# Altium PCB mcu.PcbDoc
Units mm, origin at the board's own origin, x right, y up, seen from the top; angles counter-clockwise.
Board outline 160 x 160 mm, 4 copper layers (Top Layer, Layer 1, Layer 2, Bottom Layer), stack 0.603 mm thick; 98 components, 70 nets, 317 pads, 0 vias.
Unrouted connection lines stored in the file: 138.
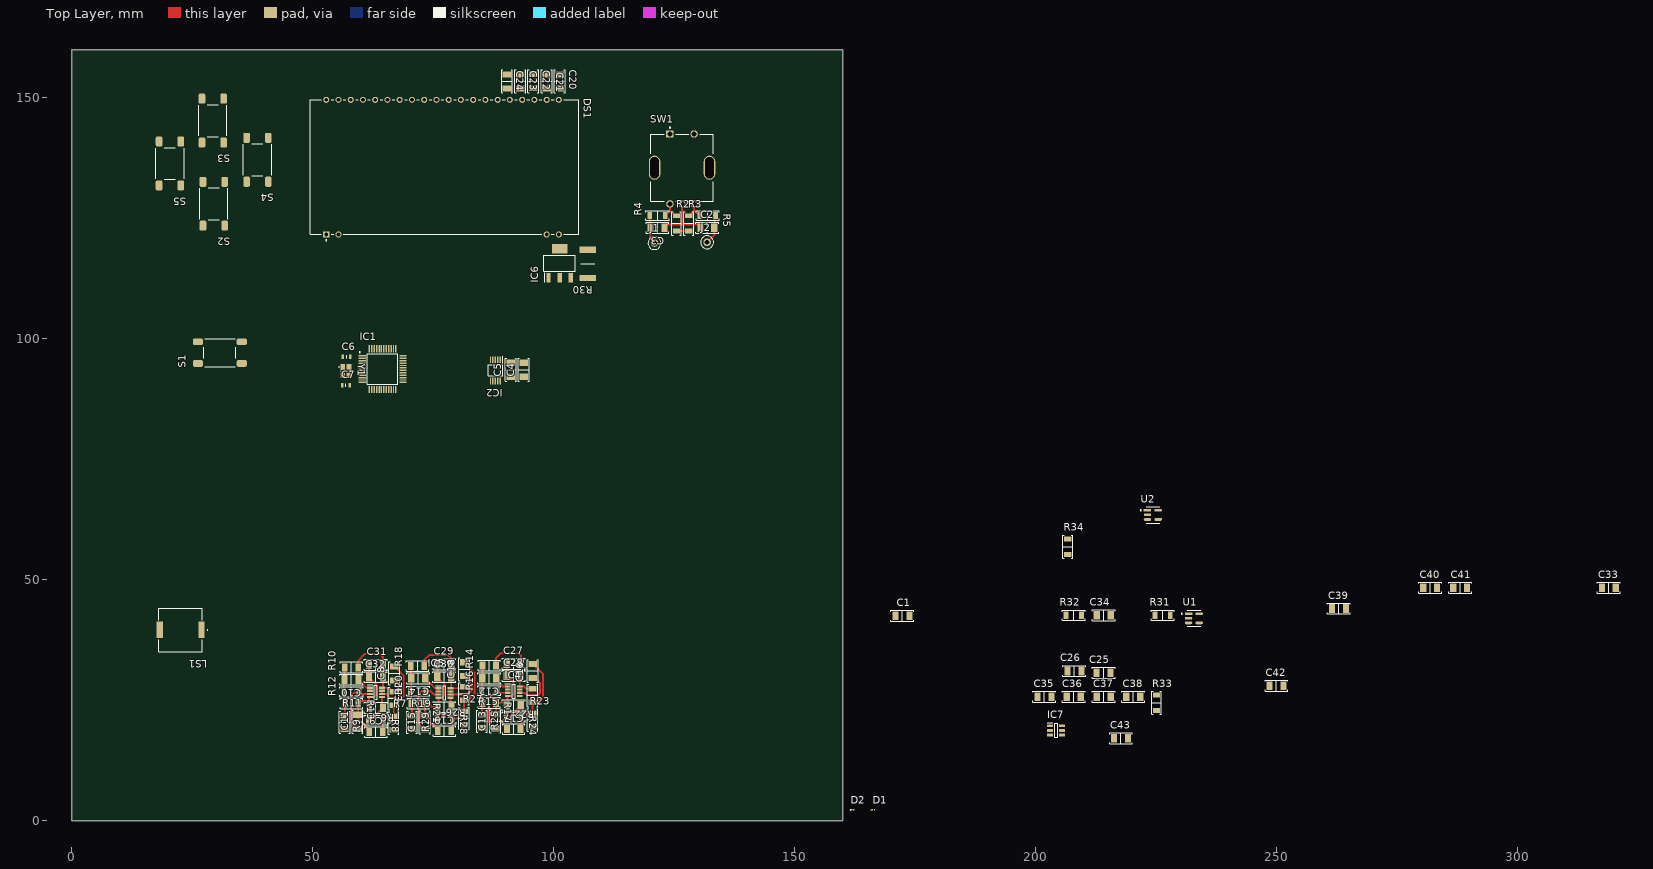
[diagram p0: Top Layer view]
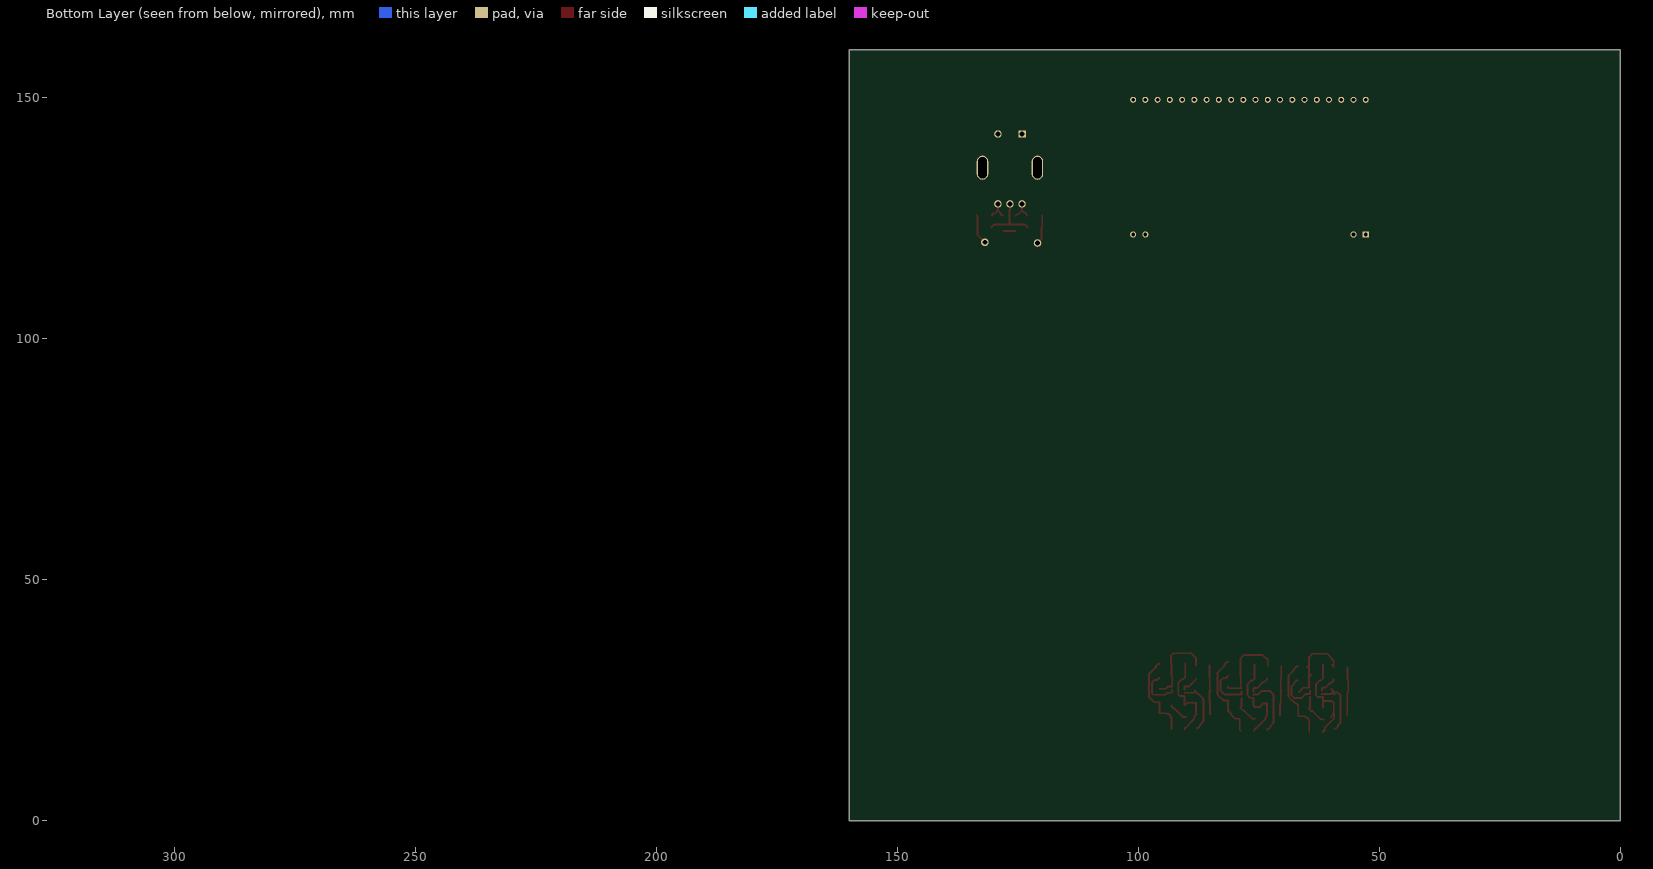
[diagram p1: Bottom Layer view, seen from below]

## Layer stack, top to bottom
Top Solder: solder mask 0.0102, Solder Resist, Dk 3.5
Top Layer: signal copper 0.0356
Dielectric 2: prepreg 0.0711, PP-006, Dk 4.1
Layer 1: signal copper 0.035
Dielectric 1: dielectric 0.32, FR-4, Dk 4.8
Layer 2: signal copper 0.035
Dielectric 3: prepreg 0.0711, PP-006, Dk 4.1
Bottom Layer: signal copper 0.0356
Bottom Solder: solder mask 0.0102, Solder Resist, Dk 3.5

## Board outline
0,0 0,160 160,160 160,0

## Design rules (kind name [scope] priority, off if disabled: settings)
BoardOutlineClearance [All] p1: gap=0.3 ignorepadtopadclearanceinfootprint=FALSE except(0.4: Arc-SplitBarrior Arc-SplitContinuation Track-SplitBarrior Track-SplitContinuation SMDPad-SplitBarrior SMDPad-SplitContinuation THPad-SplitBarrior THPad-SplitContinuation Via-SplitBarrior Via-SplitContinuation Fill-SplitBarrior Fill-SplitContinuation Poly-SplitBarrior Poly-SplitContinuation Region-SplitBarrior Region-SplitContinuation Text-SplitBarrior Text-SplitContinuation)
Clearance "Clearance Different Nets" [All] p1: gap=0.2 ignorepadtopadclearanceinfootprint=FALSE except(0.089: Arc-Arc Arc-Track Arc-SMDPad Track-Track Track-SMDPad; 0.127: SMDPad-SMDPad SMDPad-Via THPad-Via Via-Via; 0.254: Arc-Via Arc-Text Track-Via Track-Text SMDPad-Text THPad-Text Via-Text Fill-Text Poly-Text Region-Text Text-Text; 0.5: THPad-THPad Via-Hole)
Clearance "Clearance Same Nets" [All] p2: gap=0.2 ignorepadtopadclearanceinfootprint=FALSE except(0.089: Arc-Arc Arc-Track Arc-SMDPad Track-Track Track-SMDPad SMDPad-SMDPad; 0.127: SMDPad-Via THPad-Via; 0.254: Arc-Via Arc-Text Track-Via Track-Text SMDPad-Text THPad-Text Via-Via Via-Text Fill-Text Poly-Text Region-Text Text-Text)
Clearance "Clearance Bottom Layer" [OnLayer('Bottom Layer')] p3: gap=0.203 ignorepadtopadclearanceinfootprint=TRUE except(0.254: Arc-Text Track-Text SMDPad-Text THPad-Text Via-Text Fill-Text Poly-Text Region-Text Text-Text)
Clearance "Clearance Top Layer" [OnLayer('Top Layer')] p4: gap=0.203 ignorepadtopadclearanceinfootprint=TRUE except(0.254: Arc-Text Track-Text SMDPad-Text THPad-Text Via-Text Fill-Text Poly-Text Region-Text Text-Text)
Clearance [All] p5: gap=0.254 ignorepadtopadclearanceinfootprint=FALSE except(0: Arc-Hole Track-Hole SMDPad-Hole THPad-Hole Via-Hole Fill-Hole Poly-Hole Region-Hole Text-Hole)
Height [All] p1: minheight=0 maxheight=50 prefheight=12.7
HoleSize [All] p1: absolutevalues=TRUE maxlimit=6.3 minlimit=0.2 maxpercent=80.000 minpercent=20.000
MinimumAnnularRing [All] p1: minimumring=0.13
MinimumSolderMaskSliver [All] p1: minsoldermaskwidth=0.1
ParallelSegment [All] p1: limit=254 gap=0.254
PolygonConnect PolygonConnect_1 [All] p1: thpad.connectstyle=Relief thpad.reliefconductorwidth=0.508 thpad.reliefentries=4 thpad.polygonreliefangle="90 Angle" thpad.airgapwidth=0.254 smdpad.connectstyle=Relief smdpad.reliefconductorwidth=0.508 smdpad.reliefentries=4 smdpad.polygonreliefangle="90 Angle" smdpad.airgapwidth=0.254 via.connectstyle=Direct via.reliefconductorwidth=0.508 via.reliefentries=4 via.polygonreliefangle="90 Angle" via.airgapwidth=0.254
PolygonConnect [All] p2: connectstyle=Relief reliefconductorwidth=0.254 reliefentries=4 polygonreliefangle="90 Angle" airgapwidth=0.254
RoutingCorners [All] p1: cornerstyle=Round minsetback=2.54 maxsetback=2.54
RoutingVias [All] p1: holewidth=0.5 width=1 viastyle="Through Hole" minholewidth=0.2 minwidth=0.35 maxholewidth=1 maxwidth=2
SilkToSilkClearance [All] p1: silktosilkclearance=0.1
SilkToSolderMaskClearance [IsPad] p1: minsilkscreentomaskgap=0.1 clearancetoexposedcopper=TRUE
SolderMaskExpansion [All] p1: expansion=0.102 istentingtop=FALSE
Width [All] p1: maxlimit=2.54 minlimit=0.089 preferedwidth=0.381
24 further rules are at their usual default settings.

## Classes and differential pairs
component class power: C25 C26 C27 C28 C29 C30 C31 C32 C33 C34 C35 C36 C37 C38 C39 C40 C41 C42 C43 IC7 R31 R32 R33 R34 U1 U2
component class LCD: C20 C21 C22 C23 C24 DS1 IC6 R30 R?
component class filters: C8 C9 C10 C11 C12 C13 C14 C15 C16 C17 C18 C19 IC3 IC4 IC5 R6 R7 R8 R9 R10 R11 R12 R13 R14 R15 R16 R17 R18 R19 R20 R21 R22 R23 R24 R25 R26 R27 R28 R29
component class misc: C2 C3 C4 C5 C6 C7 D1 D2 IC2 J1 J2 LS1 R2 R3 R4 R5 S2 S3 S4 S5 SW1 Y1
component class MCU: C1 IC1 S1

## Components (designator, comment, footprint, x,y, rotation, side; value= is the part's Value field where it differs from the comment)
C1 "0.1 µF" "CAP 1206_3216 - 0.8MM" 172.339,42.545 r0 top
C2 "0.1 µF" "CAP 1206_3216 - 0.8MM" 131.879,123.049 r0 top
C3 "0.1 µF" "CAP 1206_3216 - 0.8MM" 121.539,123.063 r180 top
C4 "1 µF" "CAP 1206_3216 - 0.8MM" 93.768,93.599 r90 top
C5 "0.1 µF" "CAP 1206_3216 - 0.8MM" 91.113,93.599 r90 top
C6 "4pF" CAPC1608X80N 57.023,96.266 r0 top
C7 "4pF" CAPC1608X80N 56.896,90.424 r0 top
C8 "0.1 µF" "CAP 1206_3216 - 0.8MM" 66.929,30.607 r90 top
C9 "0.1 µF" "CAP 1206_3216 - 0.8MM" 63.119,23.495 r180 top
C10 "0.1 µF" "CAP 1206_3216 - 0.8MM" 58.039,29.337 r180 top
C11 "0.1 µF" "CAP 1206_3216 - 0.8MM" 59.309,20.574 r90 top
C12 "0.1 µF" "CAP 1206_3216 - 0.8MM" 86.614,29.591 r180 top
C13 "0.1 µF" "CAP 1206_3216 - 0.8MM" 87.884,20.701 r90 top
C14 "0.1 µF" "CAP 1206_3216 - 0.8MM" 71.882,29.591 r180 top
C15 "0.1 µF" "CAP 1206_3216 - 0.8MM" 73.279,20.447 r90 top
C16 "0.1 µF" "CAP 1206_3216 - 0.8MM" 95.631,31.115 r90 top
C17 "0.1 µF" "CAP 1206_3216 - 0.8MM" 91.694,24.003 r180 top
C18 "0.1 µF" "CAP 1206_3216 - 0.8MM" 81.407,31.496 r90 top
C19 "0.1 µF" "CAP 1206_3216 - 0.8MM" 77.343,23.622 r180 top
C20 "1 µF" "CAP 1206_3216 - 0.8MM" 101.219,153.416 r270 top
C21 "1 µF" "CAP 1206_3216 - 0.8MM" 98.552,153.416 r270 top
C22 "1 µF" "CAP 1206_3216 - 0.8MM" 95.758,153.49 r270 top
C23 "1 µF" "CAP 1206_3216 - 0.8MM" 93.091,153.416 r270 top
C24 "1 µF" "CAP 1206_3216 - 0.8MM" 90.297,153.416 r270 top
C25 "2.2 µF" "CAP 1206_3216 - 0.8MM" 214.069,30.734 r0 top
C26 "2.2 µF" "CAP 1206_3216 - 0.8MM" 208.026,31.115 r0 top
C27 "1 µF" "CAP 1206_3216 - 0.8MM" 91.694,32.639 r0 top
C28 "0.1 µF" "CAP 1206_3216 - 0.8MM" 91.694,30.099 r0 top
C29 "1 µF" "CAP 1206_3216 - 0.8MM" 77.343,32.512 r0 top
C30 "0.1 µF" "CAP 1206_3216 - 0.8MM" 77.29,29.845 r0 top
C31 "1 µF" "CAP 1206_3216 - 0.8MM" 63.119,32.385 r0 top
C32 "0.1 µF" "CAP 1206_3216 - 0.8MM" 63.119,29.845 r0 top
C33 "2.2 µF" "CAP 1206_3216 - 0.8MM" 318.897,48.387 r0 top
C34 "2.2 µF" "CAP 1206_3216 - 0.8MM" 214.122,42.672 r0 top
C35 "2.2 µF" "CAP 1206_3216 - 0.8MM" 201.803,25.781 r0 top
C36 "2.2 µF" "CAP 1206_3216 - 0.8MM" 207.899,25.781 r0 top
C37 "2.2 µF" "CAP 1206_3216 - 0.8MM" 214.122,25.781 r0 top
C38 "2.2 µF" "CAP 1206_3216 - 0.8MM" 220.218,25.781 r0 top
C39 "0.1 µF" "CAP 1206_3216 - 0.8MM" 262.89,44.069 r0 top
C40 "4.7 µF" "CAP 1206_3216 - 0.8MM" 281.813,48.387 r0 top
C41 "0.1 µF" "CAP 1206_3216 - 0.8MM" 288.036,48.387 r0 top
C42 "1 µF" "CAP 1206_3216 - 0.8MM" 249.936,28.067 r0 top
C43 "10 µF" "CAP 1206_3216 - 0.8MM" 217.678,17.145 r0 top
D1 "ESDAXLC18-1BF4" ESDAXLC181BF4 166.37,2.286 r0 top
D2 "ESDAXLC18-1BF4" ESDAXLC181BF4 162.052,2.286 r0 top
DS1 "EA DOGM132W-5" FP-EA_DOGM132L-5-MFG 77.343,135.636 r0 top
IC1 "STM32G030C8T6" QFP50P900X900X160-48N 64.516,93.726 r0 top
IC2 "MCP4728-E_UN" SOP50P490X110-10N 87.884,93.472 r270 top
IC3 "TLV9002IDDFR" SOT65P280X110-8N 63.119,26.67 r0 top
IC4 "TLV9002IDDFR" SOT65P280X110-8N 91.694,26.924 r0 top
IC5 "TLV9002IDDFR" SOT65P280X110-8N 77.343,26.543 r0 top
IC6 "NCR321ZX" SOT230P700X180-4N 101.219,115.697 r90 top
IC7 "REF3425IDBVR" SOT95P280X145-6N 204.216,18.796 r0 top
J1 "5001" FP-5001-MFG 120.904,119.888 r0 top
J2 "5001" FP-5001-MFG 131.826,120.049 r0 top
LS1 "CPT-9019B-SMT-TR" CPT9019BSMTTR 22.606,39.624 r180 top
R2 "10 kOhms" "YAGEO RES 1206_3216" 125.476,123.952 r90 top
R3 "10 kOhms" "YAGEO RES 1206_3216" 128.016,123.952 r90 top
R4 "10 kOhms" "YAGEO RES 1206_3216" 121.539,125.617 r180 top
R5 "10 kOhms" "YAGEO RES 1206_3216" 131.953,125.603 r0 top
R6 "10 kOhms" "RES 1206_3216" 66.802,25.4 r270 top
R7 "20 kOhms" "RES 1206_3216" 66.799,20.32 r90 top
R8 "10 kOhms" "YAGEO RES 1206_3216" 63.119,20.955 r0 top
R9 "20 kOhms" "RES 1206_3216" 63.119,18.415 r180 top
R10 "10 kOhms" "RES 1206_3216" 58.039,31.877 r180 top
R11 "20 kOhms" "RES 1206_3216" 56.642,20.447 r90 top
R12 "10 kOhms" "YAGEO RES 1206_3216" 58.039,26.797 r180 top
R13 "20 kOhms" "RES 1206_3216" 58.039,24.384 r0 top
R14 "10 kOhms" "RES 1206_3216" 86.614,32.258 r180 top
R15 "61.9 kOhms" "RES 1206_3216" 85.09,20.701 r90 top
R16 "10 kOhms" "YAGEO RES 1206_3216" 86.614,27.051 r180 top
R17 "12.1 kOhms" "RES 1206_3216" 86.614,24.511 r0 top
R18 "10 kOhms" "RES 1206_3216" 71.755,32.131 r180 top
R19 "61.9 kOhms" "RES 1206_3216" 70.612,20.447 r90 top
R20 "10 kOhms" "YAGEO RES 1206_3216" 71.882,26.924 r180 top
R21 "12.1 kOhms" "RES 1206_3216" 71.882,24.384 r0 top
R22 "10 kOhms" "RES 1206_3216" 95.631,26.035 r270 top
R23 "61.9 kOhms" "RES 1206_3216" 95.631,20.955 r90 top
R24 "10 kOhms" "YAGEO RES 1206_3216" 91.694,21.59 r0 top
R25 "12.1 kOhms" "RES 1206_3216" 91.694,19.05 r180 top
R26 "10 kOhms" "RES 1206_3216" 81.407,26.416 r270 top
R27 "61.9 kOhms" "RES 1206_3216" 81.407,21.336 r90 top
R28 "10 kOhms" "YAGEO RES 1206_3216" 77.343,21.209 r0 top
R29 "12.1 kOhms" "RES 1206_3216" 77.343,18.669 r180 top
R30 "50" RESC6332X65N 107.061,115.57 r270 top
R31 "22 kOhms" "YAGEO RES 1206_3216" 226.314,42.672 r0 top
R32 "12 kOhms" "YAGEO RES 1206_3216" 207.899,42.672 r0 top
R33 "10 kOhms" "YAGEO RES 1206_3216" 225.044,24.511 r90 top
R34 "1.2 kOhms" "YAGEO RES 1206_3216" 206.629,56.896 r90 top
S1 "FSM4JSMA" "TE FSM4JSMA" 30.734,97.155 r90 top
S2 "FSM4JSMA" "TE FSM4JSMA" 29.49,128.038 r180 top
S3 "FSM4JSMA" "TE FSM4JSMA" 29.272,145.288 r180 top
S4 "FSM4JSMA" "TE FSM4JSMA" 38.543,137.16 r180 top
S5 "FSM4JSMA" "TE FSM4JSMA" 20.382,136.398 r180 top
SW1 "PEC11R-4220F-S0012" FP-PEC11R-4220F-S0012-MFG 126.619,135.509 r0 top
U1 "ST730MR" FP-UJ-5-IPC_B 232.791,42.037 r0 top
U2 "ST730MR" FP-UJ-5-IPC_B 224.282,63.5 r0 top
Y1 "ECS-320-12-36B-CKY-TR" ECS240836QAESTR 56.896,93.323 r270 top

## Footprints (in the part's own frame and the unit in brackets; to place one, negate y for a bottom-side part, rotate by r counter-clockwise, add the part's x,y. Pads: shape width x height; smd on the part's side, far side on the other; paste and mask are expansions set on the pad)
"CAP 1206_3216 - 0.8MM" [mm] "Chip Capacitor, 2-Leads, Body 3.25x1.60mm, IPC Medium Density"
  rect 1.3x1.8 smd: 1(-1.45,0) 2(1.45,0)
  silkscreen extent -2.37,-1.12 2.37,1.12, body extent -1.6,-0.8 1.6,0.8, height 0.8
CAPC1608X80N [mm]
  rect 0.54x0.94 smd: 1(-0.8,0) 2(0.8,0)
  silkscreen extent 0,-0.3 0,0.3, body extent -0.8,-0.4 0.8,0.4, height 0.8
CPT9019BSMTTR [mm]
  rect 1.3x3.4 smd: 1(-4.35,0) 2(4.35,0)
  silkscreen extent -5.6,-4.5 4.5,4.5, body extent -4.62,-4.5 4.62,4.5, height 1.91
ECS240836QAESTR [mm]
  rect 1.2x1 smd: 1(-0.85,-0.65) 2(0.85,-0.65) 3(0.85,0.65) 4(-0.85,0.65)
  silkscreen extent -0.9,-1.45 0.1,1, body extent -1.25,-1.15 1.25,0.85, height 0.6
ESDAXLC181BF4 [mm]
  rect 0.243x0.3 smd: 1(-0.207,0) 2(0.206,0)
  silkscreen extent -0.52,-0.03 -0.48,0.03, body extent -0.3,-0.15 0.3,0.15, height 0.42
FP-5001-MFG [mm]
  round 1.57 hole 1.016 paste-2539.97 mask+0: 1(0,0)
  silkscreen extent -1.35,-1.34 1.35,1.34, body extent -1.45,-1.45 1.45,1.45, height 0.25
FP-EA_DOGM132L-5-MFG [mm]
  rect 1.25x1.25 hole 0.75 paste-2539.97 mask+0: 1(-24.53,-13.97)
  round 1.25 hole 0.75 paste-2539.97 mask+0: 2(-21.99,-13.97) 19(21.19,-13.97) 20(23.73,-13.97) 21(23.73,13.97) 22(21.19,13.97) 23(18.65,13.97) 24(16.11,13.97) 25(13.57,13.97) 26(11.03,13.97) 27(8.49,13.97) 28(5.95,13.97) 29(3.41,13.97) 30(0.87,13.97) 31(-1.67,13.97) 32(-4.21,13.97) 33(-6.75,13.97) 34(-9.29,13.97) 35(-11.83,13.97) 36(-14.37,13.97) 37(-16.91,13.97) 38(-19.45,13.97) 39(-21.99,13.97) 40(-24.53,13.97)
  silkscreen extent -27.9,-15.29 27.9,13.97, body extent -27.9,-14.12 27.9,14.12, height 2.2
FP-PEC11R-4220F-S0012-MFG [mm]
  rect 1.55x1.55 hole 1 paste-2539.97 mask+0: 1(-2.5,7)
  round 1.55 hole 1 paste-2539.97 mask+0: 2(2.5,7) A(-2.5,-7.5) B(2.5,-7.5) C(0,-7.5)
  rrect100% 2.4x5 hole 4.4 slot 1.8 at 0 deg paste-2539.97 mask+0: 3(-5.7,0) 4(5.7,0)
  silkscreen extent -6.5,-6.95 6.5,8.45, body extent -7,-7.7 7,7.2, height 27.3
FP-UJ-5-IPC_B [mm]
  rect 1.554x0.572 smd paste+0 mask+0: 1(-1.1,0.95)
  rrect100% 1.554x0.572 smd paste+0 mask+0: 2(-1.1,0) 3(-1.1,-0.95) 4(1.1,-0.95) 5(1.1,0.95)
  silkscreen extent -2.65,-1.7 1.4,1.7, body extent -2.13,-1.7 2.13,1.7, height 0.25
QFP50P900X900X160-48N [mm]
  rect 1.475x0.3 smd: 1(-4.238,2.75) 2(-4.238,2.25) 3(-4.238,1.75) 4(-4.238,1.25) 5(-4.238,0.75) 6(-4.238,0.25) 7(-4.238,-0.25) 8(-4.238,-0.75) 9(-4.238,-1.25) 10(-4.238,-1.75) 11(-4.238,-2.25) 12(-4.238,-2.75) 25(4.238,-2.75) 26(4.238,-2.25) 27(4.238,-1.75) 28(4.238,-1.25) 29(4.238,-0.75) 30(4.238,-0.25) 31(4.238,0.25) 32(4.238,0.75) 33(4.238,1.25) 34(4.238,1.75) 35(4.238,2.25) 36(4.238,2.75)
  rect 0.3x1.475 smd: 13(-2.75,-4.238) 14(-2.25,-4.238) 15(-1.75,-4.238) 16(-1.25,-4.238) 17(-0.75,-4.238) 18(-0.25,-4.238) 19(0.25,-4.238) 20(0.75,-4.238) 21(1.25,-4.238) 22(1.75,-4.238) 23(2.25,-4.238) 24(2.75,-4.238) 37(2.75,4.238) 38(2.25,4.238) 39(1.75,4.238) 40(1.25,4.238) 41(0.75,4.238) 42(0.25,4.238) 43(-0.25,4.238) 44(-0.75,4.238) 45(-1.25,4.238) 46(-1.75,4.238) 47(-2.25,4.238) 48(-2.75,4.238)
  silkscreen extent -4.85,-3.15 3.15,3.62, body extent -4.5,-4.5 4.5,4.5, height 1.6
"RES 1206_3216" [mm] "Chip Resistor, 2-Leads, Body 3.13x1.55mm, IPC Medium Density"
  rect 1.2x1.65 smd: 1(-1.4,0) 2(1.4,0)
  silkscreen extent -2.3,-1.1 2.3,1.1, body extent -1.6,-0.8 1.6,0.8, height 0.6
RESC6332X65N [mm]
  rect 1.3x3.4 smd: 1(-2.95,0) 2(2.95,0)
  silkscreen extent 0,-1.5 0,1.5, body extent -3.15,-1.6 3.15,1.6, height 0.65
SOP50P490X110-10N [mm]
  rect 1.4x0.3 smd: 1(-2.2,1) 2(-2.2,0.5) 3(-2.2,0) 4(-2.2,-0.5) 5(-2.2,-1) 6(2.2,-1) 7(2.2,-0.5) 8(2.2,0) 9(2.2,0.5) 10(2.2,1)
  silkscreen extent -2.9,-1.5 1.15,1.5, body extent -2.45,-1.5 2.45,1.5, height 1.1
SOT65P280X110-8N [mm]
  rect 1.2x0.45 smd: 1(-1.25,0.975) 2(-1.25,0.325) 3(-1.25,-0.325) 4(-1.25,-0.975) 5(1.25,-0.975) 6(1.25,-0.325) 7(1.25,0.325) 8(1.25,0.975)
  silkscreen extent -1.85,-1.45 0.3,1.55, body extent -1.41,-1.45 1.41,1.45, height 0.9
SOT95P280X145-6N [mm]
  rect 1.2x0.6 smd: 1(-1.25,0.95) 2(-1.25,0) 3(-1.25,-0.95) 4(1.25,-0.95) 5(1.25,0) 6(1.25,0.95)
  silkscreen extent -1.85,-1.45 0.3,1.6, body extent -1.4,-1.45 1.4,1.45, height 1.45
SOT230P700X180-4N [mm]
  rect 1.95x0.9 smd: 1(-3,2.3) 2(-3,0) 3(-3,-2.3)
  rect 1.95x3.2 smd: 4(3,0)
  silkscreen extent -3.98,-3.25 1.68,3.25, body extent -3.5,-3.33 3.5,3.33, height 1.65
"TE FSM4JSMA" [mm]
  rrect50% 1.4x2.1 smd: 1(2.25,4.55) 2(2.25,-4.55) 3(-2.25,4.55) 4(-2.25,-4.55)
  silkscreen extent -2.92,-3.3 2.92,3.3, body extent -3,-5 3,5, height 5.08
"YAGEO RES 1206_3216" [mm] "Chip Resistor, 2-Leads, Body 3.13x1.55mm"
  rect 1x1.5 smd: 1(-1.6,0) 2(1.6,0)
  silkscreen extent -2.4,-1 2.4,1, body extent -1.6,-0.8 1.6,0.8, height 0.6

## Part data
C1 C2 C3 C5 C8 C9 C10 C11 C12 C13 C14 C15 C16 C17 C18 C19 C28 C30 C32 C39 C41: library part 885012208087, "CAP CER 0.1UF 50V X7R 1206", Device Package="1206 (3216 Metric)", manufacturer="Würth Elektronik", Operating Temperature="-55°C ~ 125°C", Supplier Part Number 1=732-8127-1-ND, Temperature Coefficient=X7R, Tolerance=±10%, Voltage - Rated=50V, Applications="General Purpose", Capacitance="0.1 µF", componentlink1description=Datasheet, componentlink1url=https://katalog.we-online.de/pbs/datasheet/885012208087.pdf, componentlink2description="DigiKey Link", componentlink2url=https://www.digikey.com/en/products/detail/würth-elektronik/885012208087/5453982, lastupdated="6/4/2024 19:10:27", Lifecycle Status=Active, Minimum Order=1, Mounting Type="Surface Mount, MLCC", Package / Case="1206 (3216 Metric)", Packaging=TapeAndReel, Part Number=885012208087, Part Status=Active, partid=20879, price=0.06, Series=WCAP-CSGP, Size / Dimension="0.126\" L x 0.063\" W (3.20mm x 1.60mm)", Supplier 1=DigiKey, Thickness (Max)="0.035\" (0.90mm)"
C4 C20 C21 C22 C23 C24 C27 C29 C31 C42: library part 885012208093, "CAP CER 1UF 50V X7R 1206", Device Package="1206 (3216 Metric)", manufacturer="Würth Elektronik", Operating Temperature="-55°C ~ 125°C", Supplier Part Number 1=732-7577-1-ND, Temperature Coefficient=X7R, Tolerance=±10%, Voltage - Rated=50V, Applications="General Purpose", Capacitance="1 µF", componentlink1description=Datasheet, componentlink1url=https://katalog.we-online.de/pbs/datasheet/885012208093.pdf, componentlink2description="DigiKey Link", componentlink2url=https://www.digikey.com/en/products/detail/würth-elektronik/885012208093/5453432, lastupdated="6/4/2024 19:10:33", Lifecycle Status=Active, Minimum Order=1, Mounting Type="Surface Mount, MLCC", Package / Case="1206 (3216 Metric)", Packaging=TapeAndReel, Part Number=885012208093, Part Status=Active, partid=39665, price=0.10, Series=WCAP-CSGP, Size / Dimension="0.126\" L x 0.063\" W (3.20mm x 1.60mm)", Supplier 1=DigiKey, Thickness (Max)="0.075\" (1.90mm)"
C6 C7: library part C1608C0G1H040C080AA, "Capacitor", Manufacturer_Name=TDK, Arrow Part Number=C1608C0G1H040C080AA, Arrow Price/Stock=https://www.arrow.com/en/products/c1608c0g1h040c080aa/tdk, Datasheet Link=https://product.tdk.com/info/en/catalog/datasheets/mlcc_commercial_midvoltage_en.pdf, Height=0.8mm, Manufacturer_Part_Number=C1608C0G1H040C080AA
C25 C26 C33 C34 C35 C36 C37 C38: library part 885382208001, "CAP CER 2.2UF 25V X7R 1206", Device Package="1206 (3216 Metric)", manufacturer="Würth Elektronik", Operating Temperature="-55°C ~ 125°C", Supplier Part Number 1=732-13199-1-ND, Temperature Coefficient=X7R, Tolerance=±10%, Voltage - Rated=25V, Applications="Boardflex Sensitive", Capacitance="2.2 µF", componentlink2description="DigiKey Link", componentlink2url=https://www.digikey.com/en/products/detail/würth-elektronik/885382208001/9816354, Features="Soft Termination", lastupdated="6/4/2024 19:10:38", Lifecycle Status=Active, Minimum Order=1, Mounting Type="Surface Mount, MLCC", Package / Case="1206 (3216 Metric)", Packaging=TapeAndReel, Part Number=885382208001, Part Status=Active, partid=45904, price=0.35, Series=WCAP-CSST, Size / Dimension="0.126\" L x 0.063\" W (3.20mm x 1.60mm)", Supplier 1=DigiKey, Thickness (Max)="0.083\" (2.10mm)"
C40: library part 885012208094, "CAP CER 4.7UF 50V X7R 1206", Device Package="1206 (3216 Metric)", manufacturer="Würth Elektronik", Operating Temperature="-55°C ~ 125°C", Supplier Part Number 1=732-7578-1-ND, Temperature Coefficient=X7R, Tolerance=±10%, Voltage - Rated=50V, Applications="General Purpose", Capacitance="4.7 µF", componentlink1description=Datasheet, componentlink1url=https://katalog.we-online.de/pbs/datasheet/885012208094.pdf, componentlink2description="DigiKey Link", componentlink2url=https://www.digikey.com/en/products/detail/würth-elektronik/885012208094/5453433, lastupdated="6/4/2024 19:10:35", Lifecycle Status=Active, Minimum Order=1, Mounting Type="Surface Mount, MLCC", Package / Case="1206 (3216 Metric)", Packaging=TapeAndReel, Part Number=885012208094, Part Status=Active, partid=31399, price=0.36, Series=WCAP-CSGP, Size / Dimension="0.126\" L x 0.063\" W (3.20mm x 1.60mm)", Supplier 1=DigiKey, Thickness (Max)="0.075\" (1.90mm)"
C43: library part 885012208069, "CAP CER 10UF 25V X7R 1206", Device Package="1206 (3216 Metric)", manufacturer="Würth Elektronik", Operating Temperature="-55°C ~ 125°C", Supplier Part Number 1=732-7574-1-ND, Temperature Coefficient=X7R, Tolerance=±10%, Voltage - Rated=25V, Applications="General Purpose", Capacitance="10 µF", componentlink1description=Datasheet, componentlink1url=https://katalog.we-online.de/pbs/datasheet/885012208069.pdf, componentlink2description="DigiKey Link", componentlink2url=https://www.digikey.com/en/products/detail/würth-elektronik/885012208069/5453429, lastupdated="6/4/2024 19:10:32", Lifecycle Status=Active, Minimum Order=1, Mounting Type="Surface Mount, MLCC", Package / Case="1206 (3216 Metric)", Packaging=TapeAndReel, Part Number=885012208069, Part Status=Active, partid=43199, price=0.40, Series=WCAP-CSGP, Size / Dimension="0.126\" L x 0.063\" W (3.20mm x 1.60mm)", Supplier 1=DigiKey, Thickness (Max)="0.075\" (1.90mm)"
D1 D2: "TVS Diode (Bi-directional)", Manufacturer_Name=STMicroelectronics, Mouser Part Number=511-ESDAXLC18-1BF4, Arrow Part Number=ESDAXLC18-1BF4, Arrow Price/Stock=https://www.arrow.com/en/products/esdaxlc18-1bf4/stmicroelectronics, Datasheet Link=https://www.st.com/resource/en/datasheet/esdaxlc18-1bf4.pdf, Height=0.32mm, Manufacturer_Part_Number=ESDAXLC18-1BF4, Mouser Price/Stock=https://www.mouser.co.uk/ProductDetail/STMicroelectronics/ESDAXLC18-1BF4?qs=Mv7BduZupUgBxpJyOqfYsQ%3D%3D
DS1: library part CMP-137185-000001-1, "LCD MOD GRAPH 132X32 Y/G", Background Color=Green, Max Operating Temperature=70°C, Min Operating Temperature=-20°C, Nominal Supply Current=140uA, Fluid Type="STN POSITIVE", Height=27.94mm, Interface=SPI, Packaging=Bulk, Resolution (height)=32pixel, Resolution (width)=132pixel, RoHS Compliant=No, Series="EA DOGM", Supply Current=140uA, Viewing Area (height)=15mm, Viewing Area (width)=51mm, Width=55mm
IC1: "Integrated Circuit", Manufacturer_Name=STMicroelectronics, Mouser Part Number=511-STM32G030C8T6, Arrow Part Number=STM32G030C8T6, Arrow Price/Stock=https://www.arrow.com/en/products/stm32g030c8t6/stmicroelectronics?utm_currency=USD&region=nac, Datasheet Link=https://componentsearchengine.com/Datasheets/1/STM32G030C8T6.pdf, Height=1.6mm, Manufacturer_Part_Number=STM32G030C8T6, Mouser Price/Stock=https://www.mouser.co.uk/ProductDetail/STMicroelectronics/STM32G030C8T6?qs=uwxL4vQweFMKBA8wRRkiWA%3D%3D
IC2: "Integrated Circuit", Arrow Part Number=MCP4728-E/UN, Manufacturer_Name=Microchip, Mouser Part Number=579-MCP4728-E/UN, Arrow Price/Stock=https://www.arrow.com/en/products/mcp4728-eun/microchip-technology?utm_currency=USD&region=nac, Datasheet Link=http://ww1.microchip.com/downloads/en/DeviceDoc/22187E.pdf, Height=1.1mm, Manufacturer_Part_Number=MCP4728-E/UN, Mouser Price/Stock=https://www.mouser.co.uk/ProductDetail/Microchip-Technology/MCP4728-E-UN?qs=E6wAi2XWqcP2zTenScklGA%3D%3D
IC3 IC4 IC5: "Integrated Circuit", Manufacturer_Name="Texas Instruments", Mouser Part Number=595-TLV9002IDDFR, Arrow Part Number=TLV9002IDDFR, Arrow Price/Stock=https://www.arrow.com/en/products/tlv9002iddfr/texas-instruments?utm_currency=USD&region=nac, Datasheet Link=https://www.ti.com/lit/gpn/TLV9002, Height=1.1mm, Manufacturer_Part_Number=TLV9002IDDFR, Mouser Price/Stock=https://www.mouser.co.uk/ProductDetail/Texas-Instruments/TLV9002IDDFR?qs=mAH9sUMRCtuVJ6NmNV%252Bgrw%3D%3D
IC6: "Integrated Circuit", Manufacturer_Name=Nexperia, Mouser Part Number=771-NCR321ZX, Arrow Part Number=NCR321ZX, Arrow Price/Stock=https://www.arrow.com/en/products/ncr321zx/nexperia?region=nac, Datasheet Link=https://componentsearchengine.com/Datasheets/2/NCR321ZX.pdf, Height=1.8mm, Manufacturer_Part_Number=NCR321ZX, Mouser Price/Stock=https://www.mouser.co.uk/ProductDetail/Nexperia/NCR321ZX?qs=ahcBuItHZ3zTr8W8PrL%2FCg%3D%3D
IC7: "Integrated Circuit", Manufacturer_Name="Texas Instruments", Mouser Part Number=595-REF3425IDBVR, Arrow Part Number=REF3425IDBVR, Arrow Price/Stock=https://www.arrow.com/en/products/ref3425idbvr/texas-instruments?region=nac, Datasheet Link=http://www.ti.com/lit/ds/symlink/ref3425.pdf, Height=1.45mm, Manufacturer_Part_Number=REF3425IDBVR, Mouser Price/Stock=https://www.mouser.co.uk/ProductDetail/Texas-Instruments/REF3425IDBVR?qs=YCa%2FAAYMW01YJo5s3bO8wA%3D%3D
J1 J2: library part CMP-2000-05181-2, "PC TEST POINT MINIATURE BLACK", Color=Black, Flammability Rating="UL94 V-0", Package Quantity=100, Body Material=Bronze, Contact Material=Bronze, Contact Plating=Silver, Diameter=2.54mm, Height=0.3inch, Hole Diameter=1.6mm, Housing Color=Black, Inside Diameter=1.27mm, Insulation=Insulated, Insulation Material=Nylon, Lead Free="Lead Free", Length=7.62mm, Material=Nylon, Mount="Through Hole", Number of Contacts=1, Number of Ports=1, Orientation=Straight, Outside Diameter=2.54mm, Packaging=Bulk, Plating=Silver, REACH SVHC="No SVHC", RoHS Compliant=Yes, Series=THM, Termination="Through Hole"
LS1: "Loudspeaker or Buzzer", Manufacturer_Name="Same Sky", Mouser Part Number=179-CPT-9019B-SMT-TR, Datasheet Link=https://www.sameskydevices.com/product/resource/supplyframepdf/cpt-9019b-smt-tr.pdf, Height=2.1mm, Manufacturer_Part_Number=CPT-9019B-SMT-TR, Mouser Price/Stock=https://www.mouser.co.uk/ProductDetail/CUI-Devices/CPT-9019B-SMT-TR?qs=3Rah4i%252BhyCGQOzp5C27TLw%3D%3D
R2 R3 R4 R5 R8 R12 R16 R20 R24 R28 R33: library part RT1206FRE0710KL, "RES SMD 10K OHM 1% 1/4W 1206", Device Package="1206 (3216 Metric)", manufacturer=Yageo, Operating Temperature="-55°C ~ 155°C", Power (Watts)="0.25W, 1/4W", Supplier Device Package=1206, Supplier Part Number 1=YAG1242CT-ND, Temperature Coefficient=±50ppm/°C, Tolerance=±1%, componentlink1description=Datasheet, componentlink1url=https://www.yageo.com/upload/media/product/productsearch/datasheet/rchip/PYu-RT_1-to-0.01_RoHS_L_11.pdf, componentlink2description="DigiKey Link", componentlink2url=https://www.digikey.com/en/products/detail/yageo/RT1206FRE0710KL/1082868, Composition="Thin Film", Height - Seated (Max)="0.026\" (0.65mm)", lastupdated="7/25/2024 09:21:28", Lifecycle Status=Active, Minimum Order=1, Number of Terminations=2, Package / Case="1206 (3216 Metric)", Packaging=TapeAndReel, Part Number=RT1206FRE0710KL, Part Status=Active, partid=38903, price=0.01, Resistance="10 kOhms", Series=RT, Size / Dimension="0.122\" L x 0.063\" W (3.10mm x 1.60mm)", Supplier 1=DigiKey
R6 R10 R14 R18 R22 R26: library part ERA-8AEB103V, "RES SMD 10K OHM 0.1% 1/4W 1206", Device Package="1206 (3216 Metric)", manufacturer="Panasonic Electronic Components", Operating Temperature="-55°C ~ 155°C", Power (Watts)="0.25W, 1/4W", Ratings=AEC-Q200, Supplier Device Package=1206, Supplier Part Number 1=P10KBCCT-ND, Temperature Coefficient=±25ppm/°C, Tolerance=±0.1%, componentlink1description=Datasheet, componentlink1url=https://industrial.panasonic.com/cdbs/www-data/pdf/RDM0000/AOA0000C307.pdf, componentlink2description="DigiKey Link", componentlink2url=https://www.digikey.com/en/products/detail/panasonic-electronic-components/ERA-8AEB103V/3070742, Composition="Thin Film", Features="Automotive AEC-Q200", Height - Seated (Max)="0.028\" (0.70mm)", lastupdated="2/9/2024 20:54:17", Lifecycle Status=Active, Minimum Order=1, Number of Terminations=2, Package / Case="1206 (3216 Metric)", Packaging=TapeAndReel, Part Number=ERA-8AEB103V, Part Status=Active, partid=33990, price=0.10, Resistance="10 kOhms", Series=ERA-8A, Size / Dimension="0.126\" L x 0.063\" W (3.20mm x 1.60mm)", Supplier 1=DigiKey
R7 R9 R11 R13: library part ERA-8AEB203V, "RES SMD 20K OHM 0.1% 1/4W 1206", Device Package="1206 (3216 Metric)", manufacturer="Panasonic Electronic Components", Operating Temperature="-55°C ~ 155°C", Power (Watts)="0.25W, 1/4W", Ratings=AEC-Q200, Supplier Device Package=1206, Supplier Part Number 1=P20KBCCT-ND, Temperature Coefficient=±25ppm/°C, Tolerance=±0.1%, componentlink1description=Datasheet, componentlink1url=https://industrial.panasonic.com/cdbs/www-data/pdf/RDM0000/AOA0000C307.pdf, componentlink2description="DigiKey Link", componentlink2url=https://www.digikey.com/en/products/detail/panasonic-electronic-components/ERA-8AEB203V/3070867, Composition="Thin Film", Features="Automotive AEC-Q200", Height - Seated (Max)="0.028\" (0.70mm)", lastupdated="2/9/2024 20:54:17", Lifecycle Status=Active, Minimum Order=1, Number of Terminations=2, Package / Case="1206 (3216 Metric)", Packaging=TapeAndReel, Part Number=ERA-8AEB203V, Part Status=Active, partid=33988, price=0.10, Resistance="20 kOhms", Series=ERA-8A, Size / Dimension="0.126\" L x 0.063\" W (3.20mm x 1.60mm)", Supplier 1=DigiKey
R15 R19 R23 R27: library part ERA-8AEB6192V, "RES SMD 61.9K OHM 0.1% 1/4W 1206", Device Package="1206 (3216 Metric)", manufacturer="Panasonic Electronic Components", Operating Temperature="-55°C ~ 155°C", Power (Watts)="0.25W, 1/4W", Ratings=AEC-Q200, Supplier Device Package=1206, Supplier Part Number 1=P61.9KBCCT-ND, Temperature Coefficient=±25ppm/°C, Tolerance=±0.1%, componentlink1description=Datasheet, componentlink1url=https://industrial.panasonic.com/cdbs/www-data/pdf/RDM0000/AOA0000C307.pdf, componentlink2description="DigiKey Link", componentlink2url=https://www.digikey.com/en/products/detail/panasonic-electronic-components/ERA-8AEB6192V/3071114, Composition="Thin Film", Features="Automotive AEC-Q200", Height - Seated (Max)="0.028\" (0.70mm)", lastupdated="2/9/2024 20:53:52", Lifecycle Status=Active, Minimum Order=1, Number of Terminations=2, Package / Case="1206 (3216 Metric)", Packaging=TapeAndReel, Part Number=ERA-8AEB6192V, Part Status=Active, partid=41065, price=0.10, Resistance="61.9 kOhms", Series=ERA-8A, Size / Dimension="0.126\" L x 0.063\" W (3.20mm x 1.60mm)", Supplier 1=DigiKey
R17 R21 R25 R29: library part ERA-8AEB1212V, "RES SMD 12.1K OHM 0.1% 1/4W 1206", Device Package="1206 (3216 Metric)", manufacturer="Panasonic Electronic Components", Operating Temperature="-55°C ~ 155°C", Power (Watts)="0.25W, 1/4W", Ratings=AEC-Q200, Supplier Device Package=1206, Supplier Part Number 1=10-ERA-8AEB1212VCT-ND, Temperature Coefficient=±25ppm/°C, Tolerance=±0.1%, componentlink1description=Datasheet, componentlink1url=https://industrial.panasonic.com/cdbs/www-data/pdf/RDM0000/AOA0000C307.pdf, componentlink2description="DigiKey Link", componentlink2url=https://www.digikey.com/en/products/detail/panasonic-electronic-components/ERA-8AEB1212V/3070771, Composition="Thin Film", Features="Automotive AEC-Q200", Height - Seated (Max)="0.028\" (0.70mm)", lastupdated="2/9/2024 20:54:30", Lifecycle Status=Active, Minimum Order=1, Number of Terminations=2, Package / Case="1206 (3216 Metric)", Packaging=TapeAndReel, Part Number=ERA-8AEB1212V, Part Status=Active, partid=30396, price=0.10, Resistance="12.1 kOhms", Series=ERA-8A, Size / Dimension="0.126\" L x 0.063\" W (3.20mm x 1.60mm)", Supplier 1=DigiKey
R30: library part RNCL2512FT50R0, "Resistor", Manufacturer_Name="Stackpole Electronics", Datasheet Link=https://www.seielect.com/catalog/sei-rncl.pdf, Height=0.65mm, Manufacturer_Part_Number=RNCL2512FT50R0, Resistance=50
R31: library part RT1206FRE0722KL, "RES SMD 22K OHM 1% 1/4W 1206", Device Package="1206 (3216 Metric)", manufacturer=Yageo, Operating Temperature="-55°C ~ 155°C", Power (Watts)="0.25W, 1/4W", Supplier Device Package=1206, Supplier Part Number 1=13-RT1206FRE0722KLCT-ND, Temperature Coefficient=±50ppm/°C, Tolerance=±1%, componentlink1description=Datasheet, componentlink1url=https://www.yageo.com/upload/media/product/productsearch/datasheet/rchip/PYu-RT_1-to-0.01_RoHS_L_12.pdf, componentlink2description="DigiKey Link", componentlink2url=https://www.digikey.com/en/products/detail/yageo/RT1206FRE0722KL/1083042, Composition="Thin Film", Height - Seated (Max)="0.026\" (0.65mm)", lastupdated="7/25/2024 09:21:19", Lifecycle Status=Active, Minimum Order=1, Number of Terminations=2, Package / Case="1206 (3216 Metric)", Packaging=TapeAndReel, Part Number=RT1206FRE0722KL, Part Status=Active, partid=69172, price=0.01, Resistance="22 kOhms", Series=RT, Size / Dimension="0.122\" L x 0.063\" W (3.10mm x 1.60mm)", Supplier 1=DigiKey
R32: library part RT1206FRE0712KL, "RES SMD 12K OHM 1% 1/4W 1206", Device Package="1206 (3216 Metric)", manufacturer=Yageo, Operating Temperature="-55°C ~ 155°C", Power (Watts)="0.25W, 1/4W", Supplier Device Package=1206, Supplier Part Number 1=13-RT1206FRE0712KLCT-ND, Temperature Coefficient=±50ppm/°C, Tolerance=±1%, componentlink1description=Datasheet, componentlink1url=https://www.yageo.com/upload/media/product/productsearch/datasheet/rchip/PYu-RT_1-to-0.01_RoHS_L_12.pdf, componentlink2description="DigiKey Link", componentlink2url=https://www.digikey.com/en/products/detail/yageo/RT1206FRE0712KL/1082900, Composition="Thin Film", Height - Seated (Max)="0.026\" (0.65mm)", lastupdated="7/25/2024 09:21:22", Lifecycle Status=Active, Minimum Order=1, Number of Terminations=2, Package / Case="1206 (3216 Metric)", Packaging=TapeAndReel, Part Number=RT1206FRE0712KL, Part Status=Active, partid=58377, price=0.01, Resistance="12 kOhms", Series=RT, Size / Dimension="0.122\" L x 0.063\" W (3.10mm x 1.60mm)", Supplier 1=DigiKey
R34: library part RT1206FRE071K2L, "RES SMD 1.2K OHM 1% 1/4W 1206", Device Package="1206 (3216 Metric)", manufacturer=Yageo, Operating Temperature="-55°C ~ 155°C", Power (Watts)="0.25W, 1/4W", Supplier Device Package=1206, Supplier Part Number 1=13-RT1206FRE071K2LCT-ND, Temperature Coefficient=±50ppm/°C, Tolerance=±1%, componentlink1description=Datasheet, componentlink1url=https://www.yageo.com/upload/media/product/productsearch/datasheet/rchip/PYu-RT_1-to-0.01_RoHS_L_12.pdf, componentlink2description="DigiKey Link", componentlink2url=https://www.digikey.com/en/products/detail/yageo/RT1206FRE071K2L/1082995, Composition="Thin Film", Height - Seated (Max)="0.026\" (0.65mm)", lastupdated="7/25/2024 09:21:22", Lifecycle Status=Active, Minimum Order=1, Number of Terminations=2, Package / Case="1206 (3216 Metric)", Packaging=TapeAndReel, Part Number=RT1206FRE071K2L, Part Status=Active, partid=58383, price=0.01, Resistance="1.2 kOhms", Series=RT, Size / Dimension="0.122\" L x 0.063\" W (3.10mm x 1.60mm)", Supplier 1=DigiKey
S1 S2 S3 S4 S5: "SWITCH TACTILE SPST-NO 0.05A 24V", Contact Rating @ Voltage="0.05A @ 24VDC", manufacturer="TE Connectivity ALCOSWITCH Switches", Operating Force=160gf, Operating Temperature="-35°C ~ 85°C", Supplier Part Number 1=450-1129-ND, Actuator Height off PCB, Vertical=5.00mm, Actuator Orientation="Top Actuated", Actuator Type=Standard, Circuit=SPST-NO, componentlink1description=Datasheet, componentlink1url=https://www.te.com/commerce/DocumentDelivery/DDEController?Action=srchrtrv&DocNm=1308111-1_SWITCHES_CORE_PROGRAM_CATALOG&DocType=CS&DocLang=English, componentlink2description="DigiKey Link", componentlink2url=https://www.digikey.com/en/products/detail/te-connectivity-alcoswitch-switches/FSM4JSMA/525821, Illumination=Non-Illuminated, lastupdated="6/3/2024 20:19:31", Lifecycle Status=Active, Minimum Order=1, Mounting Type="Surface Mount", Outline="6.00mm x 6.00mm", Packaging=Bulk, Part Number=FSM4JSMA, Part Status=Active, price=0.14, Series=FSMJSMA, Supplier 1=DigiKey, Switch Function=Off-Mom, Termination Style="Gull Wing"
SW1: "ROTARY ENCODER MECHANICAL 12PPR", Max Operating Temperature=70°C, Min Operating Temperature=-30°C, Package Quantity=150, Built in Switch=Yes, Detent=Yes, Encoder Type=Mechanical, Height=13.4mm, Hole Diameter=7mm, Length=26.5mm, Mount="Through Hole", Number of Channels=2, Number of Pins=5, Orientation=Vertical, Output Type=Quadrature, Packaging=Bulk, Pulses per Revolution=12, Radiation Hardening=No, REACH SVHC="No SVHC", RoHS Compliant=Yes, Series=PEC11R, Termination="PC Pin", Type=Mechanical, Width=12.5mm
Y1: "Crystal or Oscillator", Manufacturer_Name=ECS, Mouser Part Number=520-320-12-36B-CKYT, Arrow Part Number=ECS-320-12-36B-CKY-TR, Arrow Price/Stock=https://www.arrow.com/en/products/ecs-320-12-36b-cky-tr/ecs-international, Datasheet Link=https://www.ecsxtal.com/store/pdf/ECX-2236B.pdf, Height=0mm, Manufacturer_Part_Number=ECS-320-12-36B-CKY-TR, Mouser Price/Stock=https://www.mouser.co.uk/ProductDetail/ECS/ECS-320-12-36B-CKY-TR?qs=l7cgNqFNU1juKISosFzRbg%3D%3D

## Nets (pads, with @x,y where several pads share a name; then routed paths per layer and width w, separated by ;. In a path a pad name is that pad's centre, name@x,y a point inside that pad or via, vN(x,y) a via of type N, cw(c..) or ccw(c..) an arc to the next point about the centre after c; other vN are vias at no path point)
+3.3: C25.2 C26.2 C40.2 C41.2 C42.2 DS1.34 DS1.35 IC1.4 IC1.6 IC7.3 IC7.4 R2.1 R3.1 R31.2 U1.1 | length 2.5
  Top Layer w0.381: R2.1 R3.1
GND: C1.1 C2.1 C3.1 C4.1 C5.1 C6.2 C7.1 C9.2 C11.2 C13.2 C15.2 C17.2 C19.2 C20.1 C21.1 C22.1 C23.1 C24.1 C25.1 C26.1 C27.1 C28.1 C29.1 C30.1 C31.1 C32.1 C33.1 C34.1 C35.1 C36.1 C37.1 C38.1 C39.1 C40.1 C41.1 C42.1 C43.1 D1.1 D2.1 DS1.26 DS1.33 IC1.7 IC2.10 IC3.4 IC4.4 IC5.4 IC6.3 IC7.1 IC7.2 LS1.2 R9.2 R13.2 R17.2 R21.2 R25.2 R29.2 R30.2 R32.2 R34.2 S1.1 S1.2 S2.1 S2.2 S3.1 S3.2 S4.1 S4.2 S5.1 S5.2 SW1.1 SW1.3 SW1.4 SW1.C U1.2 U2.2 Y1.2 Y1.4 | length 74.6
  Top Layer w0.381: R13.2@59.439,24.257 59.439,22.154 C11.2@59.637,22.352 ; R13.2 59.439,24.482 59.849,24.891 60.529,24.891 ; C11.2@60.019,21.512 60.019,21.564 59.559,22.024 C11.2 59.413,21.92 59.413,21.232 61.309,19.336 R9.2@61.309,19.049 ; 60.529,24.892 61.669,24.892 ; C9.2 61.669,24.892 ; C31.1 C32.1 61.669,29.595 62.129,29.135 62.379,29.135 63.119,28.395 63.119,26.035 62.779,25.695 IC3.4 ; IC3.4@61.704,25.695 61.669,25.66 61.669,24.892 ; C29.1 75.893,29.898 C30.1 75.84,29.595 76.3,29.135 76.55,29.135 77.343,28.342 77.343,26.076 76.835,25.568 IC5.4 76.093,23.822 C19.2 74.803,23.622 74.041,24.384 R21.2 73.279,24.381 C15.2 73.637,21.539 73.637,21.105 75.439,19.303 75.533,19.303 75.943,18.894 R29.2 ; C13.2 88.014,22.281 R17.2 89.784,24.511 90.244,24.051 C17.2 90.444,24.203 IC4.4 91.354,25.949 91.694,26.289 91.694,28.649 90.954,29.389 90.704,29.389 90.244,29.849 C28.1 C27.1 ; C13.2@87.915,22.151 88.374,21.691 88.374,21.195 90.294,19.275 R25.2 ; C3.1 122.989,123.238 123.449,123.698 126.608,123.698 ; SW1.C 126.619,126.746 126.746,126.619 126.746,123.836 126.608,123.698 ; C2.1 130.429,123.238 129.969,123.698 126.608,123.698 ; R9.2@61.309,19.049 61.309,18.825 R9.2 61.719,18.64 R9.2@61.309,19.049
LCD_\C\S\1: DS1.40 IC1.40
LCD_\R\S\T: DS1.39 IC1.41
LCD_A0: DS1.38 IC1.37
LCD_PWR: C37.2 C38.2 DS1.32 R33.2 U2.1
LCD_SCL: DS1.37 IC1.39
LCD_SI: DS1.36 IC1.38
NetC1_2: C1.2 IC1.10 S1.3 S1.4
NetC2_2: C2.2 IC1.29 J2.1 R5.2 | length 6.3
  Top Layer w0.381: J2.1 133.329,121.552 C2.2 133.329,125.379 R5.2
NetC3_2: C3.2 IC1.30 J1.1 R4.2 | length 6.1
  Top Layer w0.381: R4.2 119.939,123.213 C3.2 120.089,120.703 J1.1
NetC6_1: C6.1 IC1.8 Y1.1
NetC7_2: C7.2 IC1.9 Y1.3
NetC8_1: C8.1 IC1.16 IC3.6 IC3.7 | length 8.8
  Top Layer w0.381: IC3.7 IC3.6 65.222,26.345 66.04,25.527 67.691,25.527 68.199,26.035 68.199,27.887 67.639,28.447 67.639,28.697 67.179,29.157 C8.1
NetC8_2: C8.2 R6.2 R7.2 R8.2 R9.1 | length 17.4
  Top Layer w0.381: R9.1 64.519,20.755 R8.2 64.719,21.205 65.029,21.515 65.279,21.515 65.484,21.72 R7.2 66.799,23.997 67.212,24.41 67.463,24.41 68.834,25.781 68.834,30.152 67.639,31.347 67.639,31.597 67.179,32.057 C8.2
NetC9_1: C9.1 IC3.5 R8.1 | length 6.5
  Top Layer w0.381: R8.1 61.651,21.087 62.161,21.087 63.859,22.785 64.109,22.785 64.569,23.245 C9.1 64.369,23.695 IC3.5
NetC10_1: C10.1 IC1.13 IC3.1 IC3.2 | length 3.9
  Top Layer w0.381: C10.1 59.489,29.087 59.949,28.627 60.199,28.627 61.15,27.676 61.838,27.676 IC3.1 IC3.2
NetC10_2: C10.2 R10.2 R11.2 R12.2 R13.1 | length 10.2
  Top Layer w0.381: R10.2 56.589,31.827 C10.2 56.439,29.187 R12.2 56.639,26.597 R13.1 56.642,24.381 R11.2
NetC11_1: C11.1 IC3.3 R12.1 | length 13.2
  Top Layer w0.381: C11.1 59.059,19.124 58.599,19.584 58.599,19.834 58.039,20.394 58.039,26.035 58.674,26.67 59.624,26.67 R12.1@59.639,26.655 ; R12.1@59.329,26.237 59.639,26.547 R12.1@59.639,26.655 ; R12.1@59.949,27.357 59.639,27.047 R12.1 R12.1@59.639,26.655 ; IC3.3 59.949,26.345 R12.1@59.639,26.655
NetC12_1: C12.1 IC1.17 IC4.1 IC4.2 | length 3.9
  Top Layer w0.381: C12.1 88.064,29.341 89.044,28.361 89.044,28.357 89.502,27.899 IC4.1 IC4.2
NetC12_2: C12.2 R14.2 R15.2 R16.2 R17.1 | length 10.4
  Top Layer w0.381: R15.2 85.09,24.387 R17.1 85.214,26.851 R16.2 85.164,27.201 C12.2 85.214,29.641 R14.2
NetC13_1: C13.1 IC4.3 R16.1 | length 11.6
  Top Layer w0.381: C13.1 87.634,19.251 87.174,19.711 87.174,19.961 86.487,20.648 86.487,25.324 87.654,26.491 87.904,26.491 88.141,26.728 88.141,26.978 R16.1 R16.1@88.214,26.909 ; R16.1@88.268,26.855 R16.1@88.397,26.726 ; R16.1@88.524,26.599 IC4.3
NetC14_1: C14.1 IC1.14 IC5.1 IC5.2 | length 4.4
  Top Layer w0.381: C14.1 73.332,29.341 73.792,28.881 74.042,28.881 75.374,27.549 76.062,27.549 IC5.1 IC5.2
NetC14_2: C14.2 R18.2 R19.2 R20.2 R21.1 | length 10.6
  Top Layer w0.381: R20.2 R20.2@70.432,27.074 ; R18.2 70.355,29.668 C14.2 R20.2@70.432,27.074 ; R19.2 70.612,24.254 R21.1 70.432,24.434 R20.2@70.432,27.074
NetC15_1: C15.1 IC5.3 R20.1 | length 12.7
  Top Layer w0.381: C15.1 73.029,18.997 72.569,19.457 72.569,19.707 71.934,20.342 71.934,26.214 72.644,26.924 R20.1 74.508,26.924 75.214,26.218 IC5.3
NetC16_1: C16.1 IC1.18 IC4.6 IC4.7 | length 9.4
  Top Layer w0.381: IC4.7 IC4.6 93.924,26.599 94.361,26.162 96.901,26.162 97.185,26.446 97.185,28.677 96.651,29.21 96.086,29.21 C16.1
NetC16_2: C16.2 R22.2 R23.2 R24.2 R25.1 | length 18.2
  Top Layer w0.381: R25.1 93.094,21.39 R24.2 93.294,21.84 93.604,22.15 93.854,22.15 94.059,22.355 R23.2 R22.2 96.644,24.635 97.79,25.781 97.79,30.406 96.341,31.855 96.341,32.105 95.881,32.565 C16.2
NetC17_1: C17.1 IC4.5 R24.1 | length 4.2
  Top Layer w0.381: R24.1 90.099,21.595 90.736,21.595 92.434,23.293 92.684,23.293 93.144,23.753 C17.1
NetC18_1: C18.1 IC1.15 IC5.6 IC5.7 | length 9.3
  Top Layer w0.381: IC5.7 IC5.6 82.098,26.218 82.961,27.081 82.961,29.058 82.427,29.591 81.862,29.591 C18.1
NetC18_2: C18.2 R26.2 R27.2 R28.2 R29.1 | length 18.6
  Top Layer w0.381: R29.1 78.943,18.869 R28.2 79.88,21.209 80.773,22.102 80.773,22.326 81.182,22.736 R27.2 R26.2 82.42,25.016 83.566,26.162 83.566,30.787 82.117,32.236 82.117,32.486 81.657,32.946 C18.2
NetC19_1: C19.1 IC5.5 R28.1 | length 6.2
  Top Layer w0.381: R28.1 75.748,21.214 76.385,21.214 78.083,22.912 78.333,22.912 78.793,23.372 C19.1 78.593,23.822 IC5.5
NetC20_2: C20.2 DS1.21
NetC21_2: C21.2 DS1.22
NetC22_2: C22.2 DS1.23
NetC23_2: C23.2 DS1.24
NetC24_2: C24.2 DS1.25
NetC44_2: IC1.28 S2.3 S2.4
NetC45_2: IC1.25 S3.3 S3.4
NetC46_2: IC1.26 S4.3 S4.4
NetC47_2: IC1.27 S5.3 S5.4
NetC48_2: IC1.31 SW1.2
NetD1_2: D1.2
NetD2_2: D2.2
NetDS1_2: DS1.2 DS1.19
NetDS1_20: DS1.20 IC6.4
NetIC1_32: IC1.32 IC2.4
NetIC1_33: IC1.33 IC2.5
NetIC1_34: IC1.34 IC6.1
NetIC1_36: IC1.36 LS1.1
NetIC1_47: IC1.47 IC2.2
NetIC1_48: IC1.48 IC2.3
NetIC2_6: IC2.6
NetIC2_7: IC2.7
NetIC2_8: IC2.8
NetIC2_9: IC2.9
NetIC6_2: IC6.2 R30.1
NetR2_2: R2.2 R4.1 SW1.A | length 4.7
  Top Layer w0.381: R4.1 123.139,125.867 123.449,126.177 123.699,126.177 124.119,126.597 ; SW1.A 124.119,126.597 ; R2.2 125.166,125.862 124.855,125.862 124.119,126.597
NetR3_2: R3.2 R5.1 SW1.B | length 4.8
  Top Layer w0.381: R3.2 128.266,125.552 128.576,125.862 128.576,126.112 129.119,126.655 ; SW1.B 129.119,126.655 ; R5.1 130.353,125.753 130.043,126.063 129.711,126.063 129.119,126.655
NetR7_1: R7.1
NetR11_1: R11.1
NetR15_1: R15.1
NetR19_1: R19.1
NetR23_1: R23.1
NetR27_1: R27.1
NetR31_1: R31.1 R32.1 U1.4
NetR33_1: R33.1 R34.1 U2.4
NetU2_5: U2.5
VCC: C33.2 C34.2 C35.2 C36.2 DS1.1 U1.3 U1.5 U2.3
VDD: 
Vref: C4.2 C5.2 C27.2 C28.2 C29.2 C30.2 C31.2 C32.2 C39.2 C43.2 IC1.5 IC2.1 IC3.8 IC4.8 IC5.8 IC7.5 IC7.6 R6.1 R10.1 R14.1 R18.1 R22.1 R26.1 | length 51.9
  Top Layer w0.381: R10.1 R10.1@59.439,31.962 ; R10.1@59.849,32.371 R10.1@59.439,31.962 ; C32.2@64.122,30.292 C32.2 ; IC3.8 IC3.8@64.534,27.645 ; C31.2@65.029,31.877 C31.2@64.569,32.337 ; R6.1 66.577,26.8 65.732,27.645 IC3.8@64.534,27.645 ; R18.1 73.155,33.404 74.168,34.417 78.105,34.417 78.793,33.729 C29.2 78.793,29.898 C30.2 78.74,27.553 IC5.8@78.705,27.518 ; IC5.8 IC5.8@78.705,27.518 ; R26.1 81.109,27.518 IC5.8@78.705,27.518 ; R14.1 88.014,33.785 89.027,34.798 92.71,34.798 93.218,34.29 93.218,32.713 C27.2 C28.2 92.944,29.899 IC4.8 93.823,27.899 94.287,27.435 R22.1 ; R10.1@59.439,31.962 59.439,33.277 60.833,34.671 63.881,34.671 64.569,33.983 C31.2 C31.2@64.569,32.337 ; IC3.8@64.534,27.645 64.569,27.68 C32.2 ; C32.2 C31.2@64.569,32.337
pads on no net: DS1.27 DS1.28 DS1.29 DS1.30 DS1.31 IC1.1 IC1.2 IC1.3 IC1.11 IC1.12 IC1.19 IC1.20 IC1.21 IC1.22 IC1.23 IC1.24 IC1.35 IC1.42 IC1.43 IC1.44 IC1.45 IC1.46

## Other copper
Multi-Layer:
  text "Pour signal planes with ground, attach to layer 2 and 3 with many, many vias. Route power. /  / Isolate ground routing for DC components. /  / Add input and output fuses, input inductors, pads, input diodes. /  / Stitching vias" at 126.492,173.99 h1.52